# EAGLE board Roomba (EAGLE 9.6.2)
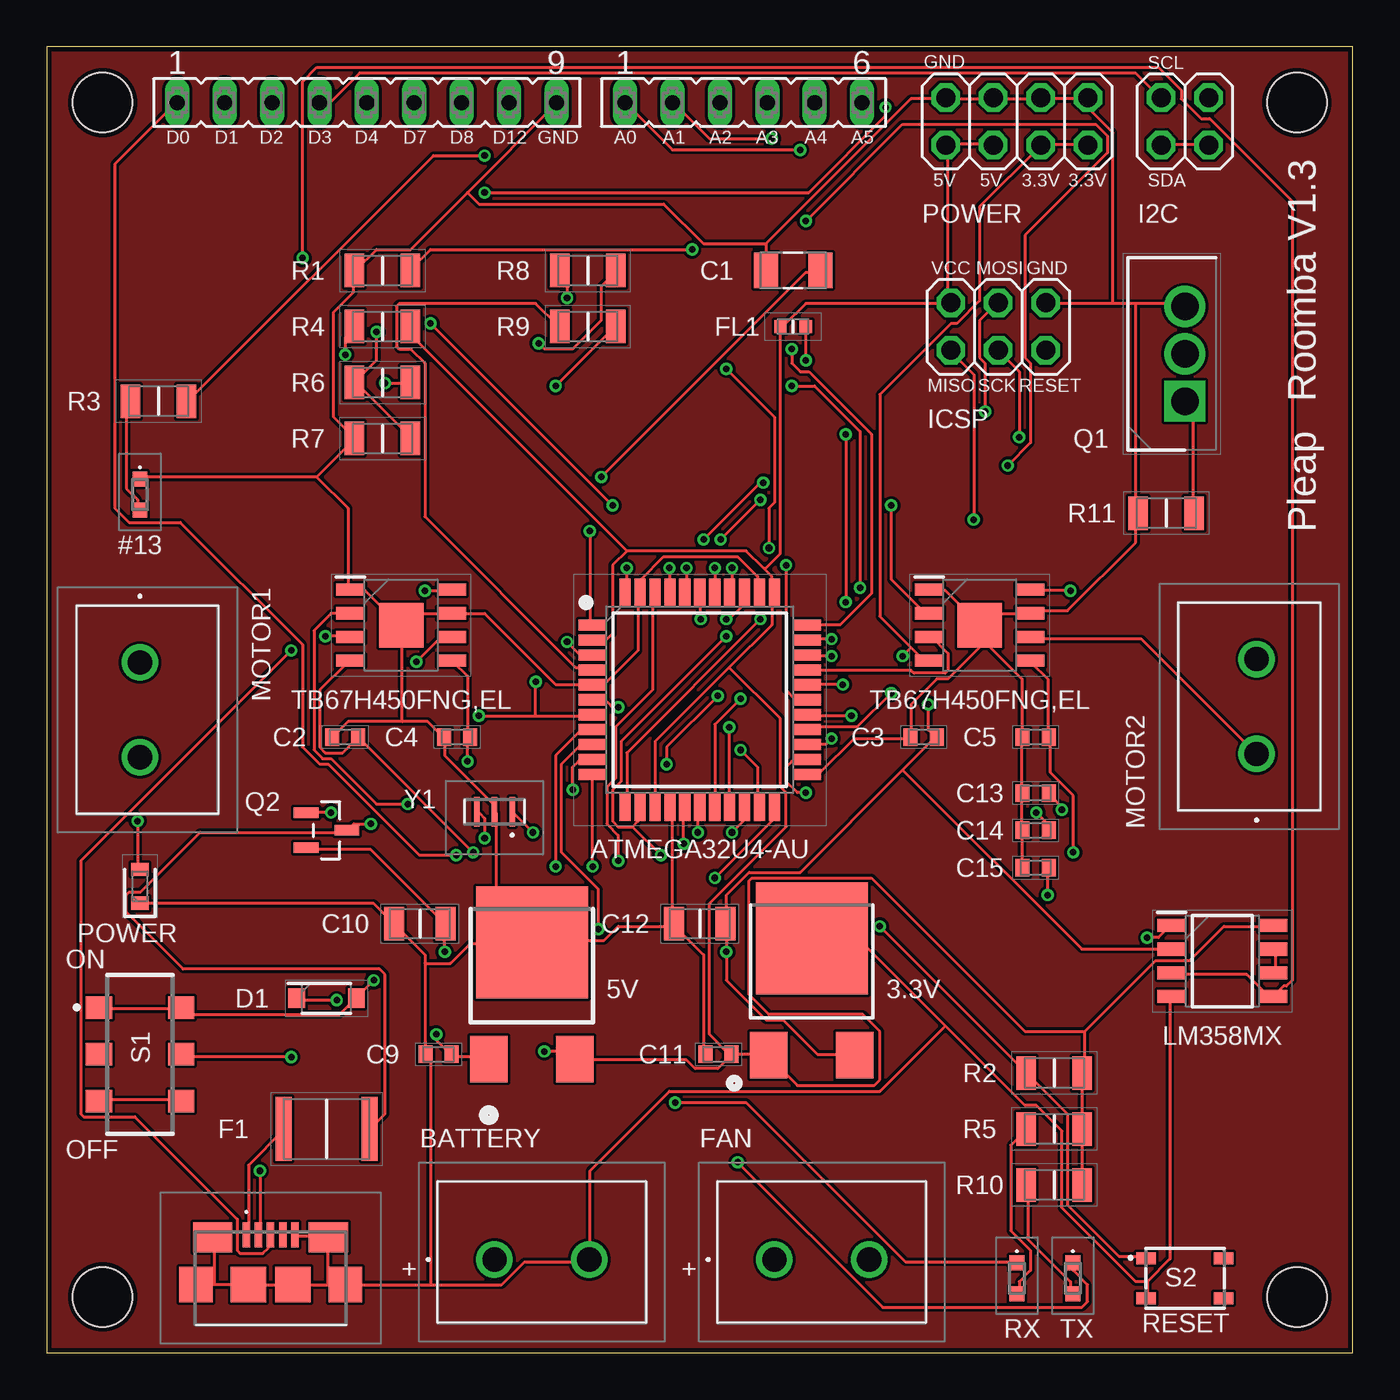
[diagram p0: board, top side]
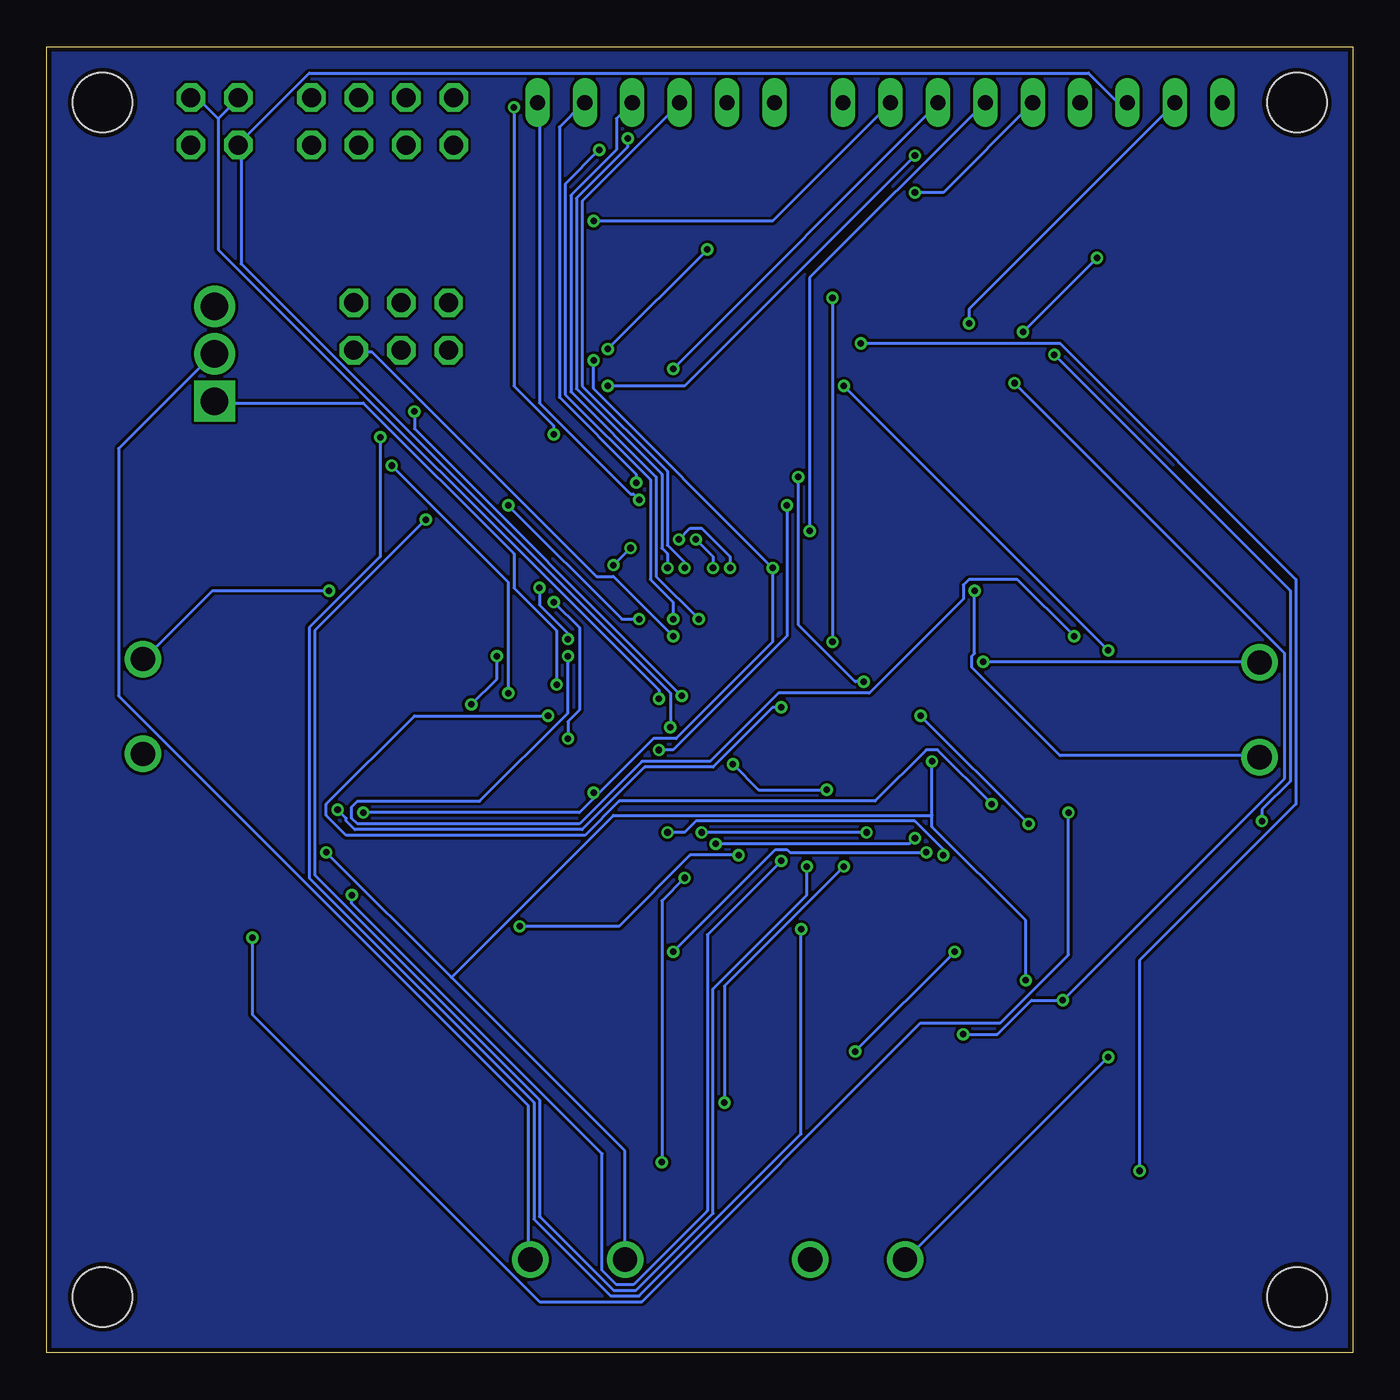
[diagram p1: board, bottom side, seen from below]

Size 70 x 70 mm. Coordinates in mm from the lower left corner, seen from the top.
Outline: 0,0 70,0 70,70 0,70 0,0
Copper layers (1*16): Top 0.035mm / dielectric 1.5mm / Bottom 0.035mm
Design rules "Fusion_PCB": minimum track width 6mil, minimum drill 12mil, track to track 6mil, track to pad 6mil, pad to pad 6mil, via to via 6mil, smd to smd 0mil, copper to edge 10mil, drill to drill 10mil, minimum pad ring 10mil, minimum via ring 6mil, stop-mask expansion 2mil, vias tented up to drill 100mil, thermal gap 10mil
Holes 3.2 mm at 3,67 67,67 67,3 3,3

## Footprints (pad centres in the part's own frame; a part is rotated, then mirrored left to right if it is on the bottom)
CAPC3216X190N = smd 1.29 x 1.91: 1 -1.46,0; 2 1.46,0
CAPC1608X90N = smd 0.75 x 0.94: 1 -0.7,0; 2 0.7,0
CAPC3216X180N = smd 1.07 x 1.82: 1 -1.38,0; 2 1.38,0
SODFL3516X90N = smd 0.9 x 1.04: 1 -1.6,0; 2 1.6,0
FUSC4632X110N = smd 0.85 x 3.43: 1 -2.3,0; 2 2.3,0
BLM18AG102BH1D = smd 0.65 x 0.7: 1 -0.675,0; 2 0.675,0
SOIC127P600X175-8N = smd 1.525 x 0.7: 1 -2.712,1.905; 2 -2.712,0.635; 3 -2.712,-0.635; 4 -2.712,-1.905; 5 2.712,-1.905; 6 2.712,-0.635; 7 2.712,0.635; 8 2.712,1.905
TO-252-3-L1_1 = smd 2 x 2.5: 1 -2.3,-6.25; 2 2.3,-6.25 | smd 6 x 6: 3 0,0
TO-252-3-L1 = smd 2 x 2.5: 1 -2.3,-8.05; 2 2.3,-8.05 | smd 6 x 6: 3 0,-1.8
QFP80P1200X1200X120-44N = smd 1.5 x 0.6: 1 -5.75,4; 2 -5.75,3.2; 3 -5.75,2.4; 4 -5.75,1.6; 5 -5.75,0.8; 6 -5.75,0; 7 -5.75,-0.8; 8 -5.75,-1.6; 9 -5.75,-2.4; 10 -5.75,-3.2; 11 -5.75,-4; 23 5.75,-4; 24 5.75,-3.2; 25 5.75,-2.4; 26 5.75,-1.6; 27 5.75,-0.8; 28 5.75,0; 29 5.75,0.8; 30 5.75,1.6; 31 5.75,2.4; 32 5.75,3.2; 33 5.75,4 | smd 0.6 x 1.5: 12 -4,-5.75; 13 -3.2,-5.75; 14 -2.4,-5.75; 15 -1.6,-5.75; 16 -0.8,-5.75; 17 0,-5.75; 18 0.8,-5.75; 19 1.6,-5.75; 20 2.4,-5.75; 21 3.2,-5.75; 22 4,-5.75; 34 4,5.75; 35 3.2,5.75; 36 2.4,5.75; 37 1.6,5.75; 38 0.8,5.75; 39 0,5.75; 40 -0.8,5.75; 41 -1.6,5.75; 42 -2.4,5.75; 43 -3.2,5.75; 44 -4,5.75
SOIC127P600X175-9N = smd 1.525 x 0.65: 1 -2.712,1.905; 2 -2.712,0.635; 3 -2.712,-0.635; 4 -2.712,-1.905; 5 2.712,-1.905; 6 2.712,-0.635; 7 2.712,0.635; 8 2.712,1.905 | smd 2.39 x 2.39: 9 0,0
TB11122U11 = drill 1.3 pad 1.95: 1 0,0; 2 5.08,0
ZX62B5PA33 = smd 0.4 x 1.35: 1 -1.3,2.325; 2 -0.65,2.325; 3 0,2.325; 4 0.65,2.325; 5 1.3,2.325 | smd 1.8 x 1.9: MP1 -4,-0.35; MP2 4,-0.35 | smd 2.1 x 1.6: MP3 -3.1,2.2; MP4 3.1,2.2 | smd 1.9 x 1.9: MP5 -1.2,-0.35; MP6 1.2,-0.35
2X03 = drill 1.016 octagon: 1 -2.54,-1.27; 2 -2.54,1.27; 3 0,-1.27; 4 0,1.27; 5 2.54,-1.27; 6 2.54,1.27
2X04 = drill 1.016 octagon: 1 -3.81,-1.27; 2 -3.81,1.27; 3 -1.27,-1.27; 4 -1.27,1.27; 5 1.27,-1.27; 6 1.27,1.27; 7 3.81,-1.27; 8 3.81,1.27
2X02 = drill 1.016 octagon: 1 -1.27,-1.27; 2 -1.27,1.27; 3 1.27,-1.27; 4 1.27,1.27
SMLE12Y8WT86 = smd 0.8 x 0.8: 1 0,0.825; 2 0,-0.825
LEDC1608X36N = smd 0.7 x 0.95: 1 -0.9,0; 2 0.9,0
TO254P470X1000X2090-3P = drill 1.47 pad 2.205 square: 1 0,0 | drill 1.47 pad 2.205: 2 2.54,0; 3 5.08,0
SOT95P237X112-3N = smd 1.321 x 0.559: 1 -1.092,0.94; 2 -1.092,-0.94; 3 1.092,0
RESC3216X60N = smd 1.05 x 1.8: 1 -1.5,0; 2 1.5,0
SSSS213202 = smd 1.2 x 1.4: 1 -2.5,-2.2; 2 0,-2.2; 3 2.5,-2.2; 4 -2.5,2.2; 5 0,2.2; 6 2.5,2.2
SMT(4.2X3.2) = smd 1.05 x 0.65: 1 -2.075,1.075; 2 2.075,1.075; 3 -2.075,-1.075; 4 2.075,-1.075
HDRVR6W70P254_1X6_1574X250X850B = drill 0.813 long: 1 0,0; 2 2.54,0; 3 5.08,0; 4 7.62,0; 5 10.16,0; 6 12.7,0
HDRVR9W70P254_1X9_2336X250X850B = drill 0.813 long: 1 0,0; 2 2.54,0; 3 5.08,0; 4 7.62,0; 5 10.16,0; 6 12.7,0; 7 15.24,0; 8 17.78,0; 9 20.32,0
CSTCE16M0V53R0 = smd 0.3 x 1.6: 1 0.95,0; 2 0,0; 3 -0.95,0

## Placement (x,y rotation side)
C1  GRM31CR61A107MEA8L  [CAPC3216X190N]  40,58 0 top
C2  GRM188F11H104ZA01B  [CAPC1608X90N]  16,33 0 top
C3  GRM188F11H104ZA01B  [CAPC1608X90N]  47,33 0 top
C4  GRM188F11H104ZA01B  [CAPC1608X90N]  22,33 0 top
C5  GRM188F11H104ZA01B  [CAPC1608X90N]  53,33 0 top
C9  GRM188F11H104ZA01B  [CAPC1608X90N]  21,16 0 top
C10  GRM31CB31A476KE15L  [CAPC3216X180N]  20,23 0 top
C11  GRM188F11H104ZA01B  [CAPC1608X90N]  36,16 0 top
C12  GRM31CB31A476KE15L  [CAPC3216X180N]  35,23 0 top
C13  GRM188R71E105KA12D  [CAPC1608X90N]  53,30 0 top
C14  GRM188R71E105KA12D  [CAPC1608X90N]  53,28 0 top
C15  GRM188F11H104ZA01B  [CAPC1608X90N]  53,26 0 top
D1  RB160M-30TR  [SODFL3516X90N]  15,19 0 top
F1  MF-MSMF010-2  [FUSC4632X110N]  15,12 0 top
FL1  BLM18PG600SN1D  [BLM18AG102BH1D]  40,55 0 top
IC9  LM358MX  [SOIC127P600X175-8N]  63,21 0 top
IC10  NJM2391DL1-05-TE1  [TO-252-3-L1_1]  26,22 0 top
IC11  NJM2391DL1-33-TE1  [TO-252-3-L1]  41,24 0 top
IC12  ATMEGA32U4-AU  [QFP80P1200X1200X120-44N]  35,35 0 top
IC13  TB67H450FNG,EL  [SOIC127P600X175-9N]  19,39 0 top
IC14  TB67H450FNG,EL  [SOIC127P600X175-9N]  50,39 0 top
J1  TB111-2-2-U-1-1  [TB11122U11]  39,5 0 top
J2  TB111-2-2-U-1-1  [TB11122U11]  24,5 0 top
J4  ZX62-B-5PA_33_  [ZX62B5PA33]  12,4 0 top
J7  TB111-2-2-U-1-1  [TB11122U11]  5,37 270 top
J8  TB111-2-2-U-1-1  [TB11122U11]  64.84,32.1 90 top
JP1  ICSP  [2X03]  51,55 0 top
JP2  POWER  [2X04]  52,66 0 top
JP3  I2C  [2X02]  61,66 0 top
LED1  SML-E12Y8WT86  [SMLE12Y8WT86]  5,46 0 top
LED2  SML-E12P8WT86  [LEDC1608X36N]  5,25 90 top
LED3  SML-E12Y8WT86  [SMLE12Y8WT86]  52,4 0 top
LED4  SML-E12Y8WT86  [SMLE12Y8WT86]  55,4 0 top
Q1  2SK2232  [TO254P470X1000X2090-3P]  61,51 90 top
Q2  IRLML2246TRPBF  [SOT95P237X112-3N]  15,28 0 top
R1  CRCW120610K0FKEA  [RESC3216X60N]  18,58 0 top
R2  CRCW120610K0FKEA  [RESC3216X60N]  54,15 0 top
R3  CRCW12061K00FKEA  [RESC3216X60N]  6,51 0 top
R4  CRCW12061K00FKEA  [RESC3216X60N]  18,55 0 top
R5  CRCW12061K00FKEA  [RESC3216X60N]  54,12 0 top
R6  CRCW120610K0FKEA  [RESC3216X60N]  18,52 0 top
R7  CRCW120610K0FKEA  [RESC3216X60N]  18,49 0 top
R8  CRCW120622R0FKEA  [RESC3216X60N]  29,58 0 top
R9  CRCW120622R0FKEA  [RESC3216X60N]  29,55 0 top
R10  CRCW12061K00FKEA  [RESC3216X60N]  54,9 0 top
R11  CRCW120610K0FKEA  [RESC3216X60N]  60,45 0 top
S1  SSSS213202  [SSSS213202]  5,16 270 top
S2  SKRPACE010  [SMT(4.2X3.2)]  61,4 0 top
U$1  6PHEADER  [HDRVR6W70P254_1X6_1574X250X850B]  31,67 0 top
U$2  9PHEADER  [HDRVR9W70P254_1X9_2336X250X850B]  7,67 0 top
Y1  CSTCE16M0V53-R0  [CSTCE16M0V53R0]  24,29 0 top

## Library data of the parts
C1 = Roomba; AVAILABILITY: Warning; DESCRIPTION: SMD capacitor X5R(EIA) with capacitance 100uF Tol.20%. Rated voltage 10Vdc 85C; MF: Murata; MP: GRM31CR61A107MEA8L; PACKAGE: 3216 Murata; PRICE: None; PURCHASE-URL: https://pricing.snapeda.com/search/part/GRM31CR61A107MEA8L/?ref=eda
C2-C5 C9 C11 C15 = Roomba; DESCRIPTION: Multilayer Ceramic Capacitors MLCC - SMD/SMT; HEIGHT: 0.9mm; MANUFACTURER_NAME: Murata Electronics; MANUFACTURER_PART_NUMBER: GRM188F11H104ZA01B; MOUSER_PART_NUMBER: N/A; MOUSER_PRICE-STOCK: https://www.mouser.co.uk/ProductDetail/Murata-Electronics/GRM188F11H104ZA01B?qs=UOvNgVTuGCqVoWhVMGXegg%3D%3D
C10 C12 = Roomba; DESCRIPTION: Murata GRM31CB31A476KE15L 47F Ceramic Multilayer Capacitor 10V dc +/-10% Tolerance SMD; HEIGHT: 1.8mm; MANUFACTURER_NAME: Murata Electronics; MANUFACTURER_PART_NUMBER: GRM31CB31A476KE15L; MOUSER_PART_NUMBER: N/A; MOUSER_PRICE-STOCK: https://www.mouser.co.uk/ProductDetail/Murata-Electronics/GRM31CB31A476KE15L/?qs=d0WKAl%252BL4KY0D4rzetl%2F5Q%3D%3D
C13 C14 = Roomba; ARROW_PART_NUMBER: GRM188R71E105KA12D; ARROW_PRICE-STOCK: https://www.arrow.com/en/products/grm188r71e105ka12d/murata-manufacturing; DESCRIPTION: Ceramic SMT capacitor 1uF 25Vdc Murata 0603 GRM 1uF Ceramic Multilayer Capacitor, 25 V dc, +125degC, X7R Dielectric, /-10%; HEIGHT: 0.9mm; MANUFACTURER_NAME: Murata Electronics; MANUFACTURER_PART_NUMBER: GRM188R71E105KA12D; MOUSER_PART_NUMBER: 81-GRM188R71E105KA2D; MOUSER_PRICE-STOCK: https://www.mouser.co.uk/ProductDetail/Murata-Electronics/GRM188R71E105KA12D/?qs=62qOe8%2Fl8sHaxJyNXtrK%2FQ%3D%3D
D1 = Roomba; DESCRIPTION: ROHM - RB160M-30TR - DIODE, SCHOTTKY, PMDS; HEIGHT: 0.9mm; MANUFACTURER_NAME: ROHM Semiconductor; MANUFACTURER_PART_NUMBER: RB160M-30TR; MOUSER_PART_NUMBER: 755-RB160M-30TR; MOUSER_PRICE-STOCK: https://www.mouser.co.uk/ProductDetail/ROHM-Semiconductor/RB160M-30TR?qs=4kLU8WoGk0udVOFL%252BfJJKQ%3D%3D
F1 = Roomba; ARROW_PART_NUMBER: MF-MSMF010-2; ARROW_PRICE-STOCK: https://www.arrow.com/en/products/mf-msmf010-2/bourns; DESCRIPTION: PTC Resettable Fuse 0.1A(hold) 0.3A(trip) 60V 40A 0.8W 1.5s 0.7Ohm SMD Solder Pad 1812 T/R Automotive; HEIGHT: 1.1mm; MANUFACTURER_NAME: Bourns; MANUFACTURER_PART_NUMBER: MF-MSMF010-2; MOUSER_PART_NUMBER: 652-MF-MSMF010-2; MOUSER_PRICE-STOCK: https://www.mouser.co.uk/ProductDetail/Bourns/MF-MSMF010-2/?qs=mkjPM10ZYVYU4yEEad9W7w%3D%3D
FL1 = Roomba; ARROW_PART_NUMBER: BLM18PG600SN1D; ARROW_PRICE-STOCK: https://www.arrow.com/en/products/blm18pg600sn1d/murata-manufacturing; DESCRIPTION: BLM18_N1D Series EMI Suppression Filter 60(Typ.) at 100MHz 1A @85; HEIGHT: 0.95mm; MANUFACTURER_NAME: Murata Electronics; MANUFACTURER_PART_NUMBER: BLM18PG600SN1D; MOUSER_PART_NUMBER: 81-BLM11P600S; MOUSER_PRICE-STOCK: https://www.mouser.co.uk/ProductDetail/Murata-Electronics/BLM18PG600SN1D?qs=LbqjZSvnDsxC2SXhhViR%252BA%3D%3D
IC9 = Roomba; ARROW_PART_NUMBER: LM358MX; ARROW_PRICE-STOCK: https://www.arrow.com/en/products/lm358mx/on-semiconductor; DESCRIPTION: ON SEMICONDUCTOR - LM358MX. - OP AMP, 0.6V/uS, SOIC-8, FULL REEL; HEIGHT: 1.75mm; MANUFACTURER_NAME: ON Semiconductor; MANUFACTURER_PART_NUMBER: LM358MX; MOUSER_PART_NUMBER: 512-LM358MX; MOUSER_PRICE-STOCK: https://www.mouser.co.uk/ProductDetail/ON-Semiconductor-Fairchild/LM358MX/?qs=k6rL%2Fc%252BPp3K5YsPvcEtWGQ%3D%3D
IC10 = Roomba; 5V: 5V; DESCRIPTION: LDO Regulator Pos 5V 1A 3-Pin TO-252 New Japan Radio NJM2391DL1-05-TE1, LDO Voltage Regulator, 1A, 5 V +/-1%, 3-Pin TO-252; HEIGHT: mm; MANUFACTURER_NAME: New Japan Radio; MANUFACTURER_PART_NUMBER: NJM2391DL1-05-TE1; MOUSER_PART_NUMBER: 513-NJM2391DL105-TE1; MOUSER_PRICE-STOCK: https://www.mouser.co.uk/ProductDetail/NJR/NJM2391DL1-05-TE1/?qs=7x5O%252BBkfEwv1AzCX%2FO1wrg%3D%3D
IC11 = Roomba; 3V3: 3.3V; DESCRIPTION: LDO Voltage Regulators LDO; HEIGHT: mm; MANUFACTURER_NAME: New Japan Radio; MANUFACTURER_PART_NUMBER: NJM2391DL1-33-TE1; MOUSER_PART_NUMBER: 513-NJM2391DL133-TE1; MOUSER_PRICE-STOCK: https://www.mouser.co.uk/ProductDetail/NJR/NJM2391DL1-33-TE1?qs=l%2FzmVEvW4JpmmNoqbD2bKw%3D%3D
IC12 = Roomba; ARROW_PART_NUMBER: ATMEGA32U4-AU; ARROW_PRICE-STOCK: https://www.arrow.com/en/products/atmega32u4-au/microchip-technology; DESCRIPTION: MCU AVR 32K FLASH 16MHZ 44-TQFP Atmel ATMEGA32U4-AU, 8bit AVR Microcontroller, 16MHz, 1 kB, 32 kB Flash, 44-Pin TQFP; HEIGHT: 1.2mm; MANUFACTURER_NAME: Microchip; MANUFACTURER_PART_NUMBER: ATMEGA32U4-AU; MOUSER_PART_NUMBER: 556-ATMEGA32U4-AU; MOUSER_PRICE-STOCK: https://www.mouser.co.uk/ProductDetail/Microchip-Technology-Atmel/ATMEGA32U4-AU/?qs=SSucg2PyLi7mKWjHIsNJ3w%3D%3D
IC13 IC14 = Roomba; ARROW_PART_NUMBER: TB67H450FNG,EL; ARROW_PRICE-STOCK: https://www.arrow.com/en/products/tb67h450fngel/toshiba; DESCRIPTION: Motor / Motion / Ignition Controllers & Drivers Brushed Motor Driver IC, 50V, 3.5A, TSSOP8 Package, PB-FREE; HEIGHT: 1.75mm; MANUFACTURER_NAME: Toshiba; MANUFACTURER_PART_NUMBER: TB67H450FNG,EL; MOUSER_PART_NUMBER: 757-TB67H450FNGEL; MOUSER_PRICE-STOCK: https://www.mouser.co.uk/ProductDetail/Toshiba/TB67H450FNGEL?qs=h6V4JsTaLXeReNg2bp0jug%3D%3D
J1 = Roomba; DESCRIPTION: Rated voltage: 300VAC Rated current: 15A; FAN: FAN; HEIGHT: 10mm; MANUFACTURER_NAME: Alphaplus; MANUFACTURER_PART_NUMBER: TB111-2-2-U-1-1; PLUS: +
J2 = Roomba; BATTERY: BATTERY; DESCRIPTION: Rated voltage: 300VAC Rated current: 15A; HEIGHT: 10mm; MANUFACTURER_NAME: Alphaplus; MANUFACTURER_PART_NUMBER: TB111-2-2-U-1-1; PLUS: +
J4 = Roomba; DESCRIPTION: USB Connectors MICRO B RECEPT RA SMT BTTM MNT; HEIGHT: 3mm; MANUFACTURER_NAME: Hirose; MANUFACTURER_PART_NUMBER: ZX62-B-5PA(33); MOUSER_PART_NUMBER: 798-ZX62-B-5PA33; MOUSER_PRICE-STOCK: https://www.mouser.co.uk/ProductDetail/Hirose-Connector/ZX62-B-5PA33/?qs=IvjI65BR3TWOr0fx8JTXXw%3D%3D
J7 = Roomba; DESCRIPTION: Rated voltage: 300VAC Rated current: 15A; HEIGHT: 10mm; MANUFACTURER_NAME: Alphaplus; MANUFACTURER_PART_NUMBER: TB111-2-2-U-1-1; MOTOR1: MOTOR1
J8 = Roomba; DESCRIPTION: Rated voltage: 300VAC Rated current: 15A; HEIGHT: 10mm; MANUFACTURER_NAME: Alphaplus; MANUFACTURER_PART_NUMBER: TB111-2-2-U-1-1; MOTOR2: MOTOR2
JP1 = pinhead; GND: GND; MISO: MISO; MOSI: MOSI; RESET: RESET; SCK: SCK; VCC: VCC
JP2 = pinhead; 3V3: 3.3V; 3V32: 3.3V; 5V: 5V; 5V2: 5V; GND: GND
JP3 = pinhead; SCL: SCL; SDA: SDA
LED1 = Roomba; #13: #13; ARROW_PART_NUMBER: SML-E12Y8WT86; ARROW_PRICE-STOCK: https://www.arrow.com/en/products/sml-e12y8wt86/rohm-semiconductor; DESCRIPTION: ROHM - SML-E12Y8WT86 - LED, YELLOW, 63MCD, 590NM, 1608; HEIGHT: 0mm; MANUFACTURER_NAME: ROHM Semiconductor; MANUFACTURER_PART_NUMBER: SML-E12Y8WT86; MOUSER_PART_NUMBER: 755-SML-E12Y8WT86; MOUSER_PRICE-STOCK: https://www.mouser.co.uk/ProductDetail/ROHM-Semiconductor/SML-E12Y8WT86/?qs=4kLU8WoGk0tv2Hg21kpX1Q%3D%3D
LED2 = Roomba; ARROW_PART_NUMBER: SML-E12P8WT86; ARROW_PRICE-STOCK: https://www.arrow.com/en/products/sml-e12p8wt86/rohm-semiconductor; DESCRIPTION: Standard LEDs - SMD SMD Green 2.5-16 mcd; HEIGHT: 0.36mm; MANUFACTURER_NAME: ROHM Semiconductor; MANUFACTURER_PART_NUMBER: SML-E12P8WT86; MOUSER_PART_NUMBER: 755-SML-E12P8WT86; MOUSER_PRICE-STOCK: https://www.mouser.co.uk/ProductDetail/ROHM-Semiconductor/SML-E12P8WT86?qs=4kLU8WoGk0vBFbk40ZI0Fw%3D%3D; POWER: POWER
LED3 = Roomba; ARROW_PART_NUMBER: SML-E12Y8WT86; ARROW_PRICE-STOCK: https://www.arrow.com/en/products/sml-e12y8wt86/rohm-semiconductor; DESCRIPTION: ROHM - SML-E12Y8WT86 - LED, YELLOW, 63MCD, 590NM, 1608; HEIGHT: 0mm; MANUFACTURER_NAME: ROHM Semiconductor; MANUFACTURER_PART_NUMBER: SML-E12Y8WT86; MOUSER_PART_NUMBER: 755-SML-E12Y8WT86; MOUSER_PRICE-STOCK: https://www.mouser.co.uk/ProductDetail/ROHM-Semiconductor/SML-E12Y8WT86/?qs=4kLU8WoGk0tv2Hg21kpX1Q%3D%3D; RX: RX
LED4 = Roomba; ARROW_PART_NUMBER: SML-E12Y8WT86; ARROW_PRICE-STOCK: https://www.arrow.com/en/products/sml-e12y8wt86/rohm-semiconductor; DESCRIPTION: ROHM - SML-E12Y8WT86 - LED, YELLOW, 63MCD, 590NM, 1608; HEIGHT: 0mm; MANUFACTURER_NAME: ROHM Semiconductor; MANUFACTURER_PART_NUMBER: SML-E12Y8WT86; MOUSER_PART_NUMBER: 755-SML-E12Y8WT86; MOUSER_PRICE-STOCK: https://www.mouser.co.uk/ProductDetail/ROHM-Semiconductor/SML-E12Y8WT86/?qs=4kLU8WoGk0tv2Hg21kpX1Q%3D%3D; TX: TX
Q1 = Roomba; DESCRIPTION: MOSFET N-Ch 60V 25A Rdson 0.046 Ohm; HEIGHT: 4.7mm; MANUFACTURER_NAME: Toshiba; MANUFACTURER_PART_NUMBER: 2SK2232; MOUSER_PART_NUMBER: 757-2SK2232; MOUSER_PRICE-STOCK: https://www.mouser.co.uk/ProductDetail/Toshiba/2SK2232?qs=8TQFHmocP6zil%2FilSisjDg%3D%3D; Q1: Q1
Q2 = Roomba; ARROW_PART_NUMBER: IRLML2246TRPBF; ARROW_PRICE-STOCK: https://www.arrow.com/en/products/irlml2246trpbf/infineon-technologies-ag; DESCRIPTION: HEXFET Power MOSFET; HEIGHT: mm; MANUFACTURER_NAME: Infineon; MANUFACTURER_PART_NUMBER: IRLML2246TRPBF; MOUSER_PART_NUMBER: 942-IRLML2246TRPBF; MOUSER_PRICE-STOCK: https://www.mouser.co.uk/ProductDetail/Infineon-IR/IRLML2246TRPBF/?qs=9%252BKlkBgLFf2Ex57ZuAl57A%3D%3D
R1 R2 R6 R7 R11 = Roomba; ARROW_PART_NUMBER: CRCW120610K0FKEA; ARROW_PRICE-STOCK: https://www.arrow.com/en/products/crcw120610k0fkea/vishay; DESCRIPTION: CRCW1206 Resistor T/R 0.25W,1%,10K Vishay CRCW Series Thick Film Surface Mount Resistor 1206 Case 10k +/-1% 0.25W +/-100ppm/C; HEIGHT: 0.6mm; MANUFACTURER_NAME: Vishay; MANUFACTURER_PART_NUMBER: CRCW120610K0FKEA; MOUSER_PART_NUMBER: 71-CRCW1206-10K-E3; MOUSER_PRICE-STOCK: https://www.mouser.co.uk/ProductDetail/Vishay-Dale/CRCW120610K0FKEA/?qs=ODaLBy2SlZHPHItpfGW8KQ%3D%3D
R3-R5 R10 = Roomba; ARROW_PART_NUMBER: CRCW12061K00FKEA; ARROW_PRICE-STOCK: https://www.arrow.com/en/products/crcw12061k00fkea/vishay; DESCRIPTION: CRCW1206 Resistor T/R 0.25W,1%,1K Vishay CRCW Series Thick Film Surface Mount Resistor 1206 Case 1k +/-1% 0.25W +/-100ppm/C; HEIGHT: 0.6mm; MANUFACTURER_NAME: Vishay; MANUFACTURER_PART_NUMBER: CRCW12061K00FKEA; MOUSER_PART_NUMBER: 71-CRCW1206-1.0K-E3; MOUSER_PRICE-STOCK: https://www.mouser.co.uk/ProductDetail/Vishay-Dale/CRCW12061K00FKEA/?qs=3XLFQ9LoC1z3na71DC8h0w%3D%3D
R8 R9 = Roomba; ARROW_PART_NUMBER: CRCW120622R0FKEA; ARROW_PRICE-STOCK: https://www.arrow.com/en/products/crcw120622r0fkea/vishay; DESCRIPTION: Vishay CRCW Series Thick Film Surface Mount Resistor 1206 Case 22 +/-1% 0.25W +/-100ppm/C; HEIGHT: 0.6mm; MANUFACTURER_NAME: Vishay; MANUFACTURER_PART_NUMBER: CRCW120622R0FKEA; MOUSER_PART_NUMBER: 71-CRCW1206-22-E3; MOUSER_PRICE-STOCK: https://www.mouser.co.uk/ProductDetail/Vishay-Dale/CRCW120622R0FKEA/?qs=bVxjDPCGUuIVF%2FMyHeEeCg%3D%3D
S1 = Roomba; DESCRIPTION: Slide Switches 1-pole 2-positions Surface Mount Slide Switch SPDT Maintained 0.3 A Slide; HEIGHT: mm; MANUFACTURER_NAME: ALPS; MANUFACTURER_PART_NUMBER: SSSS213202; MOUSER_PART_NUMBER: 688-SSSS213202; MOUSER_PRICE-STOCK: https://www.mouser.co.uk/ProductDetail/ALPS/SSSS213202?qs=6EGMNY9ZYDRKFJ9qebDCNQ%3D%3D; OFF: OFF; ON: ON
S2 = Roomba; ARROW_PART_NUMBER: SKRPACE010; ARROW_PRICE-STOCK: https://www.arrow.com/en/products/skrpace010/alps-electric; DESCRIPTION: Tactile Switches 4.2x3.2x2.5mm 260gf; HEIGHT: mm; MANUFACTURER_NAME: ALPS; MANUFACTURER_PART_NUMBER: SKRPACE010; MOUSER_PART_NUMBER: 688-SKRPACE010; MOUSER_PRICE-STOCK: https://www.mouser.co.uk/ProductDetail/ALPS/SKRPACE010?qs=dHDuPHwQO79W8iY66hDbLQ%3D%3D; RESET: RESET
U$1 = Roomba; A0: A0; A1: A1; A2: A2; A3: A3; A4: A4; A5: A5
U$2 = Roomba; D0: D0; D1: D1; D12: D12; D2: D2; D3: D3; D4: D4; D7: D7; D8: D8; GND: GND
Y1 = Roomba; DESCRIPTION: CSTCE16M0V53-R0, Ceramic Resonator, 16MHz Expander 15pF, 3-Pin SMT, 3.2 x 1.3 x 0.9mm; HEIGHT: 1mm; MANUFACTURER_NAME: Murata Electronics; MANUFACTURER_PART_NUMBER: CSTCE16M0V53-R0; MOUSER_PART_NUMBER: 81-CSTCE16M0V53-R0; MOUSER_PRICE-STOCK: https://www.mouser.co.uk/ProductDetail/Murata-Electronics/CSTCE16M0V53-R0/?qs=HPA2Xx%252BU0WhPWbRcNuzhZw%3D%3D

## Nets
#13: IC12.32 R3.2
+3.3V: C2.2 C3.2 C12.2 IC9.2 IC11.2 IC13.4 IC14.4 JP2.5 JP2.7
A0: IC12.36 U$1.1
A1: IC12.37 U$1.2
A2: IC12.38 U$1.3
A3: IC12.39 U$1.4
A4: IC12.40 U$1.5
A5: IC12.41 U$1.6
BT+: C4.2 C5.2 D1.2 IC13.5 IC14.5 J1.1 S1.1 S1.4
D0/RX: IC12.20 U$2.1
D1/TX: IC12.21 U$2.2
D2/SDA: IC12.19 JP3.1 JP3.3 U$2.3
D3/SCL: IC12.18 JP3.2 JP3.4 U$2.4
D4: IC12.25 U$2.5
D7: IC12.1 U$2.6
D8: IC12.28 U$2.7
D12: IC12.26 U$2.8
FAN: IC12.29 Q1.1 R11.2
FAN-: J1.2 Q1.2
GND: C1.1 C2.1 C3.1 C4.1 C5.1 C9.1 C10.1 C11.1 C12.1 C13.1 C14.1 C15.1 IC9.4 IC10.3 IC11.3 IC12.5 IC12.15 IC12.23 IC12.35 IC12.43 IC13.1 IC13.7 IC13.9 IC14.1 IC14.7 IC14.9 J2.2 J4.5 J4.MP1 J4.MP2 J4.MP3 J4.MP4 J4.MP5 J4.MP6 JP1.6 JP2.2 JP2.4 JP2.6 JP2.8 LED1.1 LED2.1 Q1.3 R1.1 R7.1 R11.1 S2.3 U$2.9 Y1.2
HWB: IC12.33 R1.2
MD2_IN1: IC12.30 IC14.3
MD2_IN2: IC12.12 IC14.2
MD_IN1: IC12.31 IC13.3
MD_IN2: IC12.27 IC13.2
MISO: IC12.11 JP1.1
MOSI: IC12.10 JP1.4
N$1: LED1.2 R3.1
N$2: LED2.2 R4.1
N$3: LED3.2 R5.1
N$4: LED4.2 R10.1
N$5: IC9.6 IC9.7
N$6: J2.1 S1.5
N$7: S1.3 S1.6
N$15: IC9.3 IC9.5 R6.1 R7.2
N$16: C9.2 D1.1 IC10.1 R6.2
N$17: IC9.1 Q2.1
N$18: J4.2 R8.2
N$19: J4.3 R9.2
N$20: C13.2 IC12.6
N$21: C14.2 FL1.2 IC12.24 IC12.44
N$22: IC12.17 Y1.1
N$23: IC12.16 Y1.3
N$24: C15.2 IC12.42
N$25: IC13.6 J7.1
N$26: IC13.8 J7.2
N$27: IC14.8 J8.2
N$28: IC14.6 J8.1
RD+: IC12.4 R9.1
RD-: IC12.3 R8.1
RESET: IC12.13 JP1.5 R2.1 S2.1
RX-LED: IC12.8 LED3.1
SCK: IC12.9 JP1.3
TX-LED: IC12.22 LED4.1
VBUS: F1.1 J4.1
VBUSF: C1.2 F1.2 IC12.7 Q2.3
VCC: C10.2 C11.2 FL1.1 IC9.8 IC10.2 IC11.1 IC12.2 IC12.14 IC12.34 JP1.2 JP2.1 JP2.3 Q2.2 R2.2 R4.2 R5.2 R10.2

## Tracks (layer width: path | path; a pad name or v marks a point on that pad's centre or on a via)
#13  (via drill 0.35)
  Top 0.152: v42.06,38.25 40.84,38.25 IC12.32 | v43.59,41 43.59,49.38 41.15,51.82 v39.93,51.82 | v23.47,64.16 20.73,64.16 7.62,51.05 R3.2
  Bottom 0.152: v42.06,38.25 42.06,38.56 43.59,40.08 v43.59,41 | v39.93,51.82 35.81,51.82 v23.47,64.16
+3.3V  (via drill 0.35)
  Top 0.152: 46.33,37.8 44.65,39.47 44.65,51.36 48.46,55.17 48.77,55.17 49.99,56.39 49.99,61.42 53.19,64.62 JP2.5 53.34,64.77 55.78,64.77 JP2.7 | 46.33,37.8 46.94,37.19 47.24,37.19 IC14.4 | IC13.4 16.15,37.03 14.63,35.51 14.63,32.46 14.94,32.16 15.85,32.16 16.61,32.92 C2.2 16.76,32.92 v22.86,26.82 | 45.87,31.24 40.39,25.76 37.64,25.76 36.42,24.54 36.42,23.01 C12.2 36.42,22.86 v36.42,21.49 36.42,19.96 38.56,17.83 39.47,17.83 41.3,16 43.28,16 IC11.2 | 45.87,31.24 47.55,32.92 C3.2 47.55,33.07 47.24,33.38 v47.24,34.75 | 45.87,31.24 55.47,21.64 60.2,21.64 IC9.2 | v45.87,37.34 46.33,37.8
  Bottom 0.152: v22.86,26.82 30.18,26.82 30.33,26.98 30.94,26.98 v36.42,21.49 | v45.87,37.34 45.87,36.12 v47.24,34.75
A0  (via drill 0.35)
  Top 0.152: v36.42,39.32 36.58,39.32 37.34,40.08 37.34,40.69 IC12.36 | v40.39,64.47 33.53,64.47 31.09,66.9 U$1.1
  Bottom 0.152: v36.42,39.32 36.42,40.23 37.64,41.45 37.64,46.79 42.22,51.36 42.22,62.64 v40.39,64.47
A1  (via drill 0.35)
  Top 0.152: v36.73,42.06 36.73,40.84 IC12.37 | v38.86,65.08 35.51,65.08 33.68,66.9 U$1.2
  Bottom 0.152: v36.73,42.06 36.73,42.82 37.03,43.13 37.03,47.09 41.6,51.66 41.6,61.87 38.86,64.62 v38.86,65.08
A2  (via drill 0.35)
  Top 0.152: v35.81,42.06 35.81,40.84 IC12.38
  Bottom 0.152: v35.81,42.06 35.81,42.37 36.73,43.28 36.73,47.24 41.3,51.82 41.3,61.72 36.12,66.9 U$1.3
A3  (via drill 0.35)
  Top 0.152: v35.05,39.32 35.05,40.69 IC12.39
  Bottom 0.152: v35.05,39.32 37.34,41.6 37.34,46.94 41.91,51.51 41.91,62.03 39.47,64.47 39.47,66.14 38.71,66.9 U$1.4
A4  (via drill 0.35)
  Top 0.152: v34.29,42.06 34.29,40.84 IC12.40 | v35.2,43.59 38.25,46.63 v38.41,46.63
  Bottom 0.152: v34.29,42.06 34.29,42.67 v35.2,43.59 | v38.41,46.63 38.41,47.09 42.52,51.21 42.52,65.68 41.3,66.9 U$1.5
A5  (via drill 0.35)
  Top 0.152: v33.38,42.06 33.38,40.84 IC12.41 | v38.25,45.72 v36.12,43.59
  Bottom 0.152: v33.38,42.06 33.38,42.67 34.9,44.2 35.51,44.2 v36.12,43.59 | v38.25,45.72 38.56,46.02 38.71,46.02 43.59,50.9 43.59,66.9 U$1.6
BT+  (via drill 0.35)
  Top 0.152: IC13.5 21.79,37.03 22.55,36.27 22.55,33.07 C4.2 22.55,32.92 v22.55,31.7 | S1.1 2.9,18.44 7.16,18.44 S1.4 7.32,18.44 7.62,18.14 15.7,18.14 16.46,18.9 D1.2 16.61,19.05 v17.53,19.96 | IC14.5 52.73,37.03 53.65,36.12 53.65,33.07 C5.2 53.8,32.92 53.8,31.09 55.02,29.87 v55.02,26.82
  Bottom 0.152: 22.55,28.8 22.55,28.19 17.53,23.16 v17.53,19.96 | 22.55,28.8 v22.55,31.7 | 48.31,20.12 39.01,10.82 39.01,5.03 J1.1 | 48.31,20.12 v55.02,26.82 | 22.55,28.8 39.62,28.8 48.31,20.12
BUTTOM
  pour Bottom: 0,70 0,0 70,0 70,70
D0/RX  (via drill 0.35)
  Top 0.152: v36.73,27.89 37.34,28.5 37.34,29.11 IC12.20 | v21.95,26.67 19.96,26.67 15.09,31.55 14.63,31.55 13.72,32.46 13.72,37.95 7.16,44.5 4.42,44.5 3.66,45.26 3.66,63.7 6.86,66.9 U$2.1
  Bottom 0.152: v36.73,27.89 35.81,27.89 35.2,28.5 23.47,28.5 21.95,26.98 v21.95,26.67
D1/TX  (via drill 0.35)
  Top 0.152: v37.19,32.31 38.1,31.39 38.1,29.26 IC12.21 | v20.57,55.17 v30.33,45.41
  Bottom 0.152: v37.19,32.31 36.42,32.31 30.33,38.41 v30.33,45.41 | v20.57,55.17 20.57,55.93 9.6,66.9 U$2.2
D2/SDA  (via drill 0.35)
  Top 0.152: v36.58,33.53 36.58,29.26 IC12.19 | JP3.3 62.18,64.77 59.74,64.77 JP3.1
  Bottom 0.152: v36.58,33.53 36.58,35.36 59.59,58.37 59.59,64.62 JP3.1 59.74,64.77 55.93,68.58 14.17,68.58 12.65,67.06 12.19,67.06 U$2.3
D3/SCL  (via drill 0.35)
  Top 0.152: v37.19,35.05 35.81,33.68 35.81,29.26 IC12.18 | U$2.4 14.63,67.06 15.24,67.06 16.76,68.58 58.37,68.58 59.59,67.36 JP3.2
  Bottom 0.152: v37.19,35.05 37.19,35.51 60.81,59.13 60.81,66.14 | 60.81,66.14 59.74,67.21 JP3.2 | 60.81,66.14 61.87,67.21 62.18,67.21 JP3.4
D4  (via drill 0.35)
  Top 0.152: v42.06,32.92 41.76,32.61 40.84,32.61 IC12.25 | v42.82,49.23 v42.82,40.23 | v44.96,66.75 44.96,66.29 40.84,62.18 v23.47,62.18
  Bottom 0.152: v42.06,32.92 42.06,33.83 41.45,34.44 41.45,38.86 v42.82,40.23 | v42.82,49.23 42.82,49.68 44.96,51.82 v44.96,66.75 | v23.47,62.18 21.95,62.18 17.22,66.9 U$2.5
D7  (via drill 0.35)
  Top 0.152: v29.11,44.04 29.11,39.01 IC12.1
  Bottom 0.152: v29.11,44.04 29.11,57.61 19.81,66.9 U$2.6
D8  (via drill 0.35)
  Top 0.152: v39.62,42.22 39.62,35.51 40.08,35.05 40.69,35.05 IC12.28 | v38.71,43.13 38.71,45.26 39.01,45.57 39.01,50.14 v36.42,52.73
  Bottom 0.152: v38.71,43.13 v39.62,42.22 | v36.42,52.73 22.25,66.9 U$2.7
D12  (via drill 0.35)
  Top 0.152: v45.26,35.36 43.43,33.53 40.84,33.53 IC12.26 | v51.51,47.55 52.73,48.77 52.73,53.03 52.43,53.34 52.43,59.89 56.84,64.31 56.84,65.23 56.24,65.84 45.87,65.84 v40.69,60.66
  Bottom 0.152: v45.26,35.36 45.26,41.3 v51.51,47.55 | v40.69,60.66 31.09,60.66 24.84,66.9 U$2.8
FAN  (via drill 0.35)
  Top 0.152: v42.67,35.81 40.84,35.81 IC12.29 | R11.2 61.42,45.11 61.42,50.6 61.11,50.9 Q1.1
  Bottom 0.152: v42.67,35.81 42.67,38.71 44.96,41 44.96,42.82 53.03,50.9 60.96,50.9 Q1.1
FAN-
  Bottom 0.152: J1.2 44.2,5.03 44.2,13.26 66.14,35.2 66.14,48.46 61.11,53.49 Q1.2
GND
  Top 0.152: 58.98,3.81 58.98,3.05 S2.3 | 58.98,3.81 60.2,5.03 60.2,19.05 IC9.4 | 48.16,17.53 52.43,13.26 53.03,13.26 54.41,11.89 54.41,7.77 58.37,3.81 58.98,3.81 | 48.16,17.53 43.59,22.1 41.15,22.1 IC11.3 | J4.5 13.41,6.25 15.09,6.25 J4.MP4 15.09,6.1 15.09,3.66 | 8.99,3.66 10.67,3.66 J4.MP5 10.82,3.66 13.11,3.66 J4.MP6 13.26,3.66 15.09,3.66 | 8.99,3.66 8.08,3.66 J4.MP1 | 15.09,3.66 15.85,3.66 J4.MP2 20.57,3.66 | 8.99,3.66 8.99,6.1 J4.MP3 | 20.57,3.66 24.38,3.66 25.6,4.88 28.96,4.88 J2.2 29.11,5.03 29.11,9.75 33.38,14.02 44.65,14.02 48.16,17.53 | C11.1 35.2,16 35.2,21.34 33.68,22.86 C12.1 | IC12.15 33.53,29.11 33.53,23.01 C12.1 | 20.27,20.88 20.27,21.34 18.75,22.86 C10.1 18.59,23.01 17.53,24.08 5.03,24.08 LED2.1 | 20.27,20.88 20.27,16 C9.1 20.42,15.85 20.57,15.7 20.57,3.66 | 24.08,21.95 22.71,21.95 21.64,20.88 20.27,20.88 | 24.08,21.95 25.91,21.95 IC10.3 | C12.1 33.53,22.86 30.63,22.86 29.87,22.1 26.06,22.1 IC10.3 | 38.56,59.44 38.56,58.06 C1.1 | 38.56,59.44 46.33,67.21 48.16,67.21 JP2.2 48.31,67.21 50.6,67.21 JP2.4 50.75,67.21 53.19,67.21 JP2.6 53.34,67.21 55.78,67.21 JP2.8 55.93,67.21 55.93,66.6 57.15,65.38 57.15,56.24 | 58.37,56.24 60.81,56.24 60.96,56.08 Q1.3 | 58.37,56.24 57.15,56.24 | 57.15,56.24 53.65,56.24 JP1.6 | IC12.23 40.84,31.09 41.45,31.09 43.28,32.92 46.18,32.92 C3.1 46.33,33.07 46.33,34.75 47.7,36.12 48.31,36.12 50.29,38.1 | C15.1 52.27,26.06 52.27,27.89 C14.1 52.27,28.04 52.27,29.87 C13.1 52.27,30.02 52.27,32.92 C5.1 52.27,33.07 52.27,36.12 50.29,38.1 | IC14.1 47.4,40.84 48.16,40.84 49.99,39.01 IC14.9 | IC14.9 50.14,39.01 50.75,39.62 52.58,39.62 IC14.7 52.73,39.78 54.71,39.78 58.37,43.43 58.37,44.96 R11.1 58.37,45.11 58.37,56.24
  Top 0.152: 50.29,38.1 50.14,38.25 50.14,38.86 IC14.9 | 50.29,38.1 IC14.9 | IC12.35 38.1,40.84 38.1,41.6 37.03,42.67 33.07,42.67 31.85,41.45 31.85,40.84 IC12.43 31.7,40.69 31.7,37.64 29.87,35.81 29.26,35.81 IC12.5 29.11,35.81 27.28,35.81 23.47,39.62 21.79,39.62 IC13.7 21.64,39.62 19.66,39.62 19.05,39.01 IC13.9 | IC13.9 18.9,39.01 17.07,40.84 16.31,40.84 IC13.1 16.15,41 16.15,45.26 14.48,46.94 | 19.05,33.83 20.42,33.83 21.18,33.07 C4.1 21.34,32.92 21.34,32 23.93,29.41 23.93,29.11 Y1.2 24.08,28.96 24.08,21.95 | 19.05,33.83 16.15,33.83 15.39,33.07 C2.1 | 19.05,33.83 19.05,38.86 IC13.9 | 14.48,46.94 5.03,46.94 LED1.1 | 14.48,46.94 16.46,48.92 R7.1 16.46,49.07 15.39,50.14 15.39,55.78 16.46,56.84 16.46,57.91 R1.1 16.61,58.06 17.68,59.13 19.51,59.13 22.55,62.18 | 22.55,62.18 27.28,66.9 U$2.9 | 38.56,59.44 35.2,59.44 33.07,61.57 23.16,61.57 22.55,62.18 | 24.08,21.95 IC10.3
HWB  (via drill 0.35)
  Top 0.152: v39.93,53.8 39.93,53.03 40.39,52.58 40.84,52.58 44.2,49.23 44.2,40.69 42.52,39.01 40.84,39.01 IC12.33 | v34.59,59.13 20.57,59.13 19.51,58.06 R1.2
  Bottom 0.152: v34.59,59.13 v39.93,53.8
MD2_IN1
  Top 0.152: IC12.30 40.84,36.58 46.33,36.58 46.48,36.42 48.16,36.42 48.31,36.58 48.31,37.49 47.4,38.41 IC14.3
MD2_IN2  (via drill 0.35)
  Top 0.152: v38.25,39.32 31.09,32.16 31.09,29.26 IC12.12 | v45.26,45.41 45.26,41.45 46.94,39.78 47.24,39.78 IC14.2
  Bottom 0.152: v38.25,39.32 39.17,39.32 v45.26,45.41
MD_IN1  (via drill 0.35)
  Top 0.152: v42.06,37.34 40.84,37.34 IC12.31 | v14.94,38.41 16.15,38.41 IC13.3
  Bottom 0.152: v42.06,37.34 42.06,34.29 46.79,29.57 53.34,29.57 53.65,29.26 53.65,28.65 53.34,28.35 41.45,28.35 38.1,31.7 34.44,31.7 30.79,35.36 25.91,35.36 20.88,40.39 20.88,41.15 20.57,41.45 17.98,41.45 v14.94,38.41
MD_IN2  (via drill 0.35)
  Top 0.152: v43.13,34.14 40.84,34.14 IC12.27 | v19.36,29.41 17.68,29.41 15.24,31.85 14.78,31.85 14.33,32.31 14.33,38.71 15.24,39.62 16.15,39.62 IC13.2
  Bottom 0.152: v43.13,34.14 50.29,34.14 55.02,29.41 55.02,28.8 53.95,27.74 41.15,27.74 39.32,29.57 25.6,29.57 22.86,32.31 22.25,32.31 v19.36,29.41
MISO  (via drill 0.35)
  Top 0.152: v29.26,26.06 29.26,30.94 IC12.11 | v49.68,44.65 49.68,52.43 48.46,53.65 JP1.1
  Bottom 0.152: v29.26,26.06 29.26,24.54 34.29,19.51 34.29,7.47 38.41,3.35 39.62,3.35 43.59,7.32 43.59,13.56 55.63,25.6 55.63,38.71 v49.68,44.65
MOSI  (via drill 0.35)
  Top 0.152: v28.19,30.18 28.19,31.39 28.5,31.7 29.11,31.7 IC12.10 | v33.22,31.55 33.22,32.46 v35.97,35.2 | v50.29,50.44 50.29,53.03 49.99,53.34 49.99,55.32 50.9,56.24 JP1.4
  Bottom 0.152: v28.19,30.18 31.85,30.18 v33.22,31.55 | v35.97,35.2 50.29,49.53 v50.29,50.44
N$1
  Top 0.152: LED1.2 4.88,45.26 4.88,45.72 4.27,46.33 4.27,50.75 4.42,50.9 R3.1
N$2  (via drill 0.35)
  Top 0.152: v4.88,28.5 4.88,25.91 LED2.2 | v16,53.49 16,54.41 16.46,54.86 R4.1
  Bottom 0.152: v4.88,28.5 4.88,29.11 3.35,30.63 3.35,40.84 v16,53.49
N$3
  Top 0.152: LED3.2 52.12,3.2 52.12,3.81 52.73,4.42 52.73,5.49 51.66,6.55 51.66,11.12 52.43,11.89 R5.1
N$4
  Top 0.152: LED4.2 54.86,3.2 54.86,3.81 52.58,6.1 52.58,8.99 R10.1
N$5
  Top 0.152: IC9.6 65.84,20.42 65.84,21.49 IC9.7
N$6  (via drill 0.35)
  Top 0.152: v13.11,15.85 7.32,15.85 S1.5
  Bottom 0.152: v13.11,15.85 23.93,5.03 J2.1
N$7
  Top 0.152: S1.3 2.9,13.56 7.16,13.56 S1.6
N$15  (via drill 0.35)
  Top 0.152: IC9.3 60.35,20.27 64.31,20.27 65.38,19.2 65.68,19.2 IC9.5 65.84,19.2 66.29,19.66 66.45,19.66 66.75,19.96 66.75,61.72 62.33,66.14 61.87,66.14 60.81,67.21 60.81,67.67 59.59,68.89 14.48,68.89 13.72,68.12 v13.72,58.67 | R7.2 19.51,49.07 16.61,51.97 R6.1 16.61,52.12 17.68,53.19 v17.68,54.71
  Bottom 0.152: v17.68,54.71 v13.72,58.67
N$16  (via drill 0.35)
  Top 0.152: IC10.1 23.62,15.85 21.79,15.85 C9.2 21.64,16 20.88,16.76 v20.88,17.07 | v15.54,18.9 13.41,18.9 D1.1 | v18.14,51.97 19.36,51.97 R6.2
  Bottom 0.152: v20.88,17.07 19.05,17.07 17.22,18.9 v15.54,18.9 3.66,30.79 3.66,37.49 v18.14,51.97
N$17  (via drill 0.35)
  Top 0.152: v15.24,28.96 14.02,28.96 Q2.1 | v58.98,22.25 59.59,22.25 60.2,22.86 IC9.1
  Bottom 0.152: v15.24,28.96 15.24,21.34 18.9,17.68 23.16,17.68 38.1,2.74 43.59,2.74 58.98,18.14 v58.98,22.25
N$18  (via drill 0.35)
  Top 0.152: v11.43,9.75 11.43,6.4 J4.2 | v26.36,54.1 26.67,53.8 28.19,53.8 29.72,55.32 29.72,57.15 30.48,57.91 R8.2
  Bottom 0.152: v11.43,9.75 11.43,21.03 3.05,29.41 3.05,41.45 15.7,54.1 v26.36,54.1
N$19  (via drill 0.35)
  Top 0.152: v13.11,37.64 1.83,26.36 1.83,12.8 1.98,12.65 4.72,12.65 10.21,7.16 10.21,5.49 10.36,5.33 11.58,5.33 11.89,5.64 11.89,6.25 J4.3 | v27.28,51.82 30.48,55.02 R9.2
  Bottom 0.152: v27.28,51.82 v13.11,37.64
N$20  (via drill 0.35)
  Top 0.152: v54.41,29.11 54.41,29.26 53.8,29.87 C13.2 | v30.63,34.59 30.33,34.59 30.02,34.9 29.26,34.9 IC12.6
  Bottom 0.152: v54.41,29.11 53.95,28.65 53.95,28.5 53.49,28.04 41.3,28.04 37.95,31.39 34.29,31.39 31.09,34.59 v30.63,34.59
N$21  (via drill 0.35)
  Top 0.152: v40.69,53.19 40.69,54.86 FL1.2 | v31.09,42.06 31.09,40.84 IC12.44 | v53.03,28.96 53.65,28.35 53.65,28.04 C14.2 | v40.69,30.02 40.23,30.02 39.62,30.63 39.62,31.39 39.93,31.7 40.69,31.7 IC12.24
  Bottom 0.152: v40.69,53.19 40.69,51.66 v31.09,42.06 31.09,38.1 36.27,32.92 37.49,32.92 40.54,29.87 | v53.03,28.96 41.45,28.96 40.54,29.87 | 40.54,29.87 v40.69,30.02
N$22  (via drill 0.35)
  Top 0.152: v34.9,27.89 34.9,29.11 IC12.17 | v26.06,27.89 24.99,28.96 Y1.1
  Bottom 0.152: v26.06,27.89 v34.9,27.89
N$23  (via drill 0.35)
  Top 0.152: v34.14,27.28 34.14,29.11 IC12.16 | v23.47,27.58 23.47,28.65 23.16,28.96 Y1.3
  Bottom 0.152: v34.14,27.28 23.77,27.28 v23.47,27.58
N$24  (via drill 0.35)
  Top 0.152: v53.65,24.54 53.65,25.91 C15.2 | v30.63,26.36 30.63,27.74 30.02,28.35 30.02,30.33 30.48,30.79 30.48,33.53 32.46,35.51 32.46,40.69 IC12.42
  Bottom 0.152: v53.65,24.54 53.65,24.08 40.23,10.67 40.23,4.42 39.47,3.66 38.56,3.66 34.59,7.62 34.59,22.4 v30.63,26.36
N$25  (via drill 0.35)
  Top 0.152: v19.81,37.03 21.03,38.25 21.64,38.25 IC13.6
  Bottom 0.152: v19.81,37.03 5.03,37.03 J7.1
N$26  (via drill 0.35)
  Top 0.152: v20.27,40.84 21.64,40.84 IC13.8
  Bottom 0.152: v20.27,40.84 20.27,37.49 20.42,37.34 20.42,36.73 15.7,32 5.03,32 J7.2
N$27  (via drill 0.35)
  Top 0.152: v54.86,40.84 52.73,40.84 IC14.8
  Bottom 0.152: v54.86,40.84 61.11,40.84 64.77,37.19 J8.2
N$28
  Top 0.152: IC14.6 52.73,38.25 58.67,38.25 64.77,32.16 J8.1
RD+
  Top 0.152: IC12.4 29.11,36.73 28.35,36.73 20.27,44.81 20.27,53.03 19.51,53.8 18.9,53.8 18.75,53.95 18.75,56.08 18.9,56.24 26.21,56.24 27.43,55.02 R9.1
RD-  (via drill 0.35)
  Top 0.152: v27.89,38.1 28.5,37.49 29.11,37.49 IC12.3 | v27.89,56.54 27.89,57.61 27.58,57.91 R8.1
  Bottom 0.152: v27.89,56.54 v27.89,38.1
RESET  (via drill 0.35)
  Top 0.152: S2.1 58.83,5.18 57.45,5.18 54.71,7.92 54.71,12.8 52.58,14.94 R2.1 52.43,15.09 v44.65,22.86 | 31.39,28.19 31.7,28.5 31.7,29.11 IC12.13 | 31.39,28.19 30.63,28.19 30.33,28.5 30.33,30.18 30.79,30.63 30.79,32.77 v36.42,38.41 | 31.39,28.19 v32.92,26.67
  Bottom 0.152: v36.42,38.41 39.62,41.6 40.54,41.6 52.58,53.65 53.49,53.65 JP1.5 | v44.65,22.86 39.32,22.86 35.51,26.67 v32.92,26.67
RX-LED  (via drill 0.35)
  Top 0.152: v33.68,13.41 37.49,13.41 46.02,4.88 51.97,4.88 LED3.1 | v27.28,26.06 27.28,32 28.65,33.38 29.11,33.38 IC12.8
  Bottom 0.152: v33.68,13.41 33.68,19.66 v27.28,26.06
SCK  (via drill 0.35)
  Top 0.152: v29.57,22.71 29.57,24.84 27.58,26.82 27.58,31.55 28.5,32.46 29.11,32.46 IC12.9 | v52.12,49.07 52.12,52.58 51.05,53.65 JP1.3
  Bottom 0.152: v29.57,22.71 29.57,11.73 38.25,3.05 39.78,3.05 43.89,7.16 43.89,13.41 55.93,25.45 55.93,38.86 52.12,42.67 v52.12,49.07
TOP
  pour Top: 0,70 0,0 70,0 70,70
TX-LED  (via drill 0.35)
  Top 0.152: v37.03,10.21 44.81,2.44 55.47,2.44 55.78,2.74 55.78,3.66 55.02,4.42 55.02,4.72 LED4.1 | v35.81,25.45 38.86,28.5 38.86,29.11 IC12.22
  Bottom 0.152: v37.03,10.21 37.03,24.23 v35.81,25.45
VBUS
  Top 0.152: J4.1 10.82,6.4 10.82,10.06 12.65,11.89 F1.1
VBUSF  (via drill 0.35)
  Top 0.152: F1.2 17.37,12.04 18.14,12.8 18.14,20.27 17.83,20.57 7.32,20.57 4.27,23.62 4.27,24.54 4.42,24.69 5.03,24.69 8.23,27.89 16,27.89 Q2.3 16.15,28.04 16.46,28.35 v17.37,28.35 | v23.16,34.14 26.21,34.14 | 26.21,34.14 29.11,34.14 IC12.7 | v29.72,46.94 40.69,57.91 41.45,57.91 C1.2 | 26.21,34.14 v26.21,35.97
  Bottom 0.152: v17.37,28.35 v23.16,34.14 | v29.72,46.94 29.72,39.01 26.67,35.97 v26.21,35.97
VCC  (via drill 0.35)
  Top 0.152: JP2.3 50.6,64.77 48.31,64.77 JP2.1 48.31,64.62 48.31,56.39 JP1.2 48.31,56.24 40.69,56.24 39.47,55.02 FL1.1 39.32,54.86 39.32,42.82 38.56,42.06 38.41,42.06 | 36.58,36.73 38.86,39.01 38.86,40.69 IC12.34 38.86,40.84 38.86,41.6 38.41,42.06 | 36.58,36.73 32.61,32.77 32.61,29.26 IC12.14 | 31.09,42.98 30.33,42.22 30.33,38.56 30.02,38.25 29.26,38.25 IC12.2 | 31.09,42.98 37.49,42.98 38.41,42.06 | 31.09,42.98 19.51,54.56 19.51,54.86 R4.2 | R10.2 55.47,9.14 55.47,11.89 R5.2 55.47,12.04 55.47,14.94 R2.2 55.63,15.09 55.63,17.22 | 55.63,17.22 59.44,21.03 61.27,21.03 63.09,22.86 65.68,22.86 IC9.8 | Q2.2 14.02,26.98 17.37,26.98 21.34,23.01 C10.2 21.34,22.86 v21.34,21.49 | C11.2 36.73,16 38.56,16 IC11.1 38.71,15.85 40.23,14.33 44.35,14.33 44.65,14.63 44.65,17.22 43.74,18.14 38.71,18.14 37.64,19.2 37.64,25.3 37.8,25.45 44.2,25.45 52.43,17.22 55.63,17.22 | C11.2 36.58,15.85 35.97,15.24 34.75,15.24 34.29,15.7 28.35,15.7 IC10.2 28.19,15.85 27.89,16.15 v26.67,16.15 | 36.58,36.73 39.32,33.98 39.32,30.33 39.62,30.02 39.62,28.19 35.51,24.08 35.51,17.07 36.58,16 C11.2
  Bottom 0.152: v26.67,16.15 v21.34,21.49

## Text on the board
tNames: Roomba V1.3 | Pleap